# Altium PCB PCB_power_long_clock_2022-06-03.pcbdoc
Units mil, origin at the board's own origin, x right, y up, seen from the top; angles counter-clockwise.
Board outline 2702.91 x 2805.46 mil, 2 copper layers (Top Layer, Bottom Layer); 19 components, 26 nets, 87 pads, 14 vias.
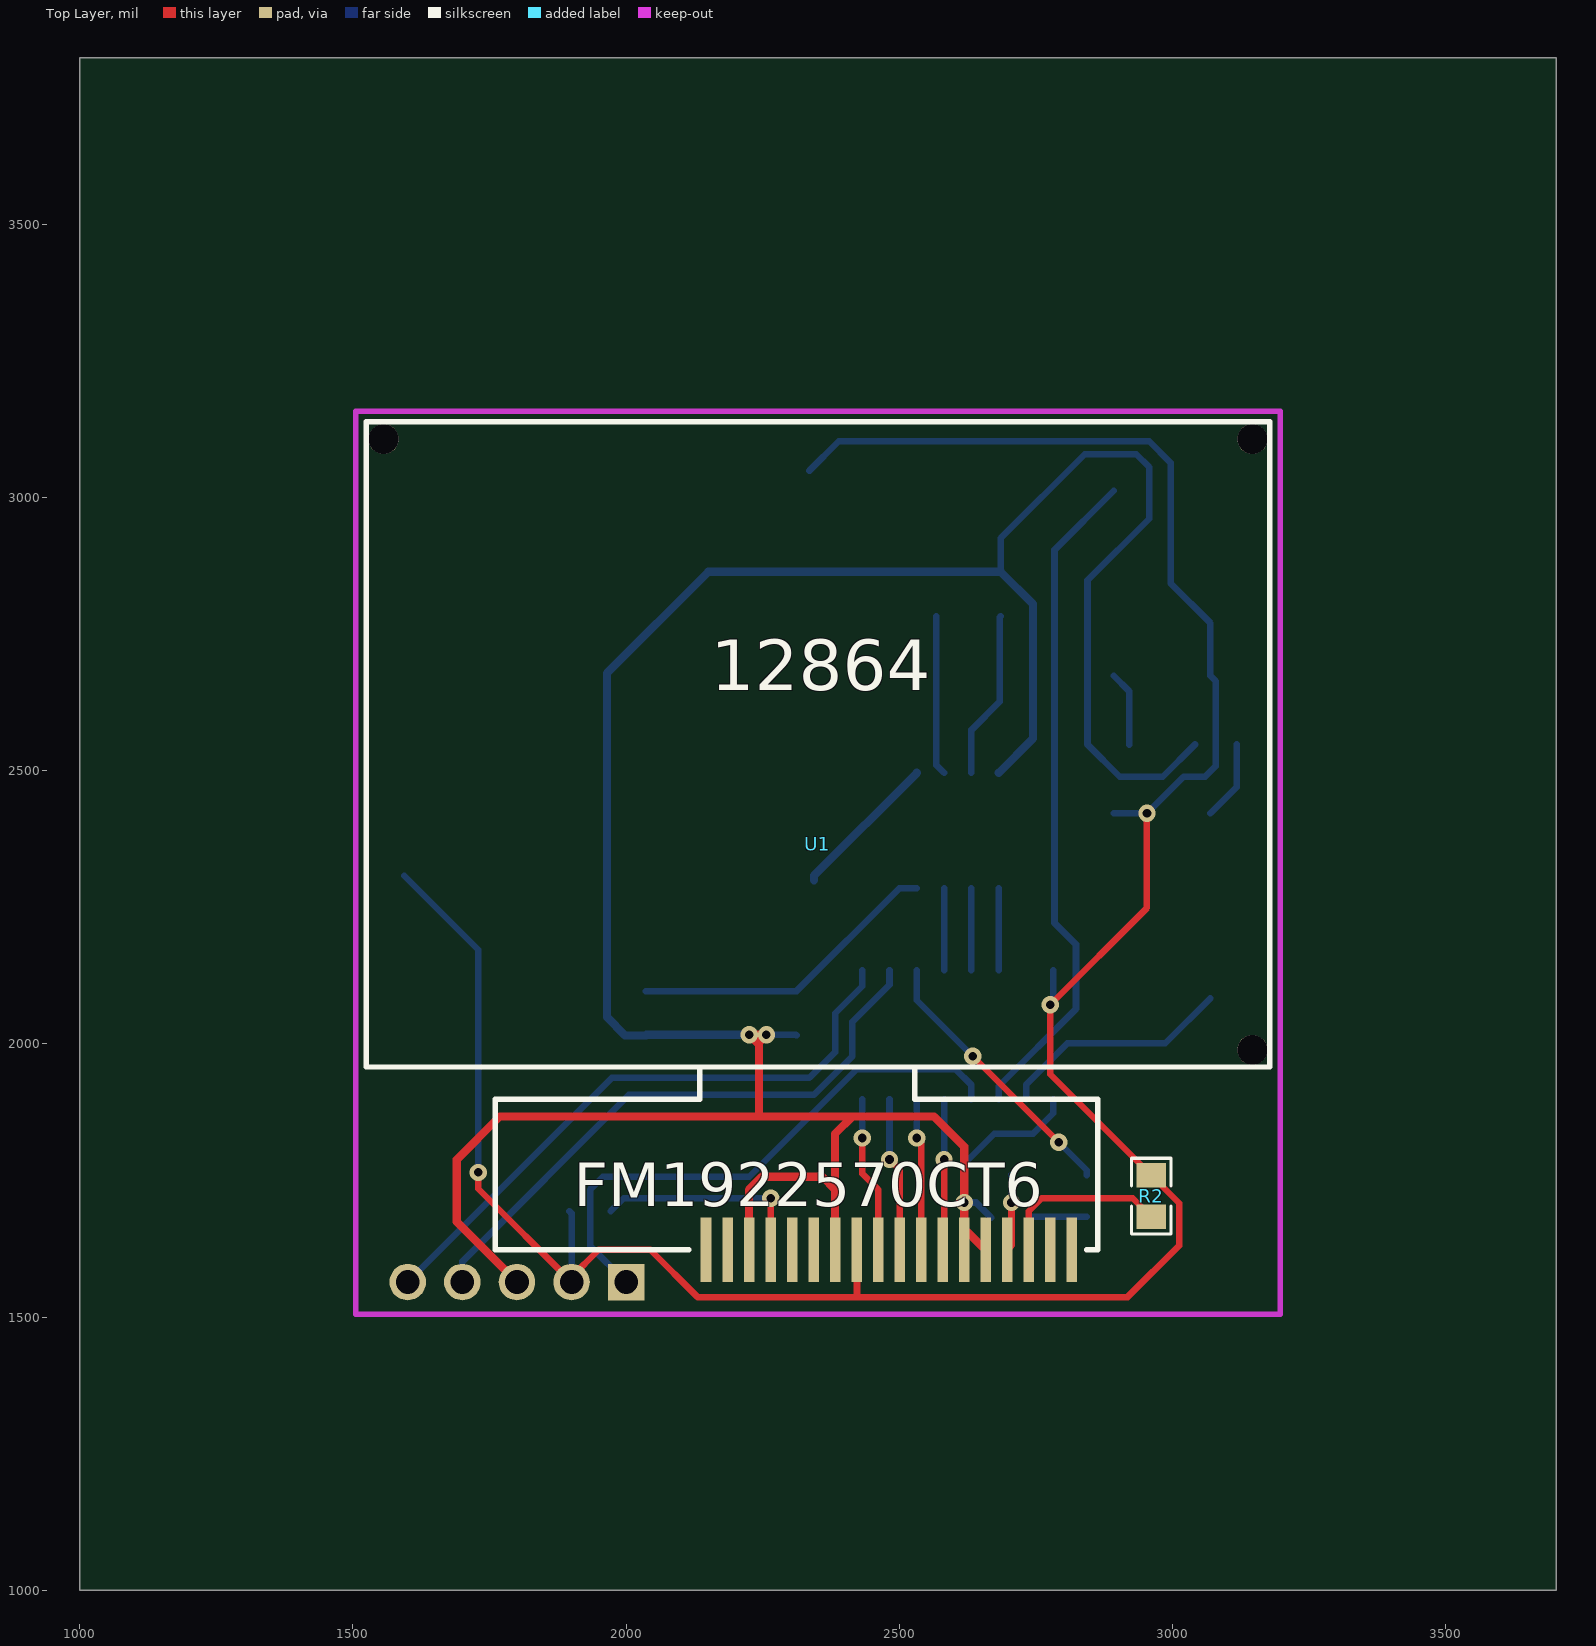
[diagram p0: Top Layer view]
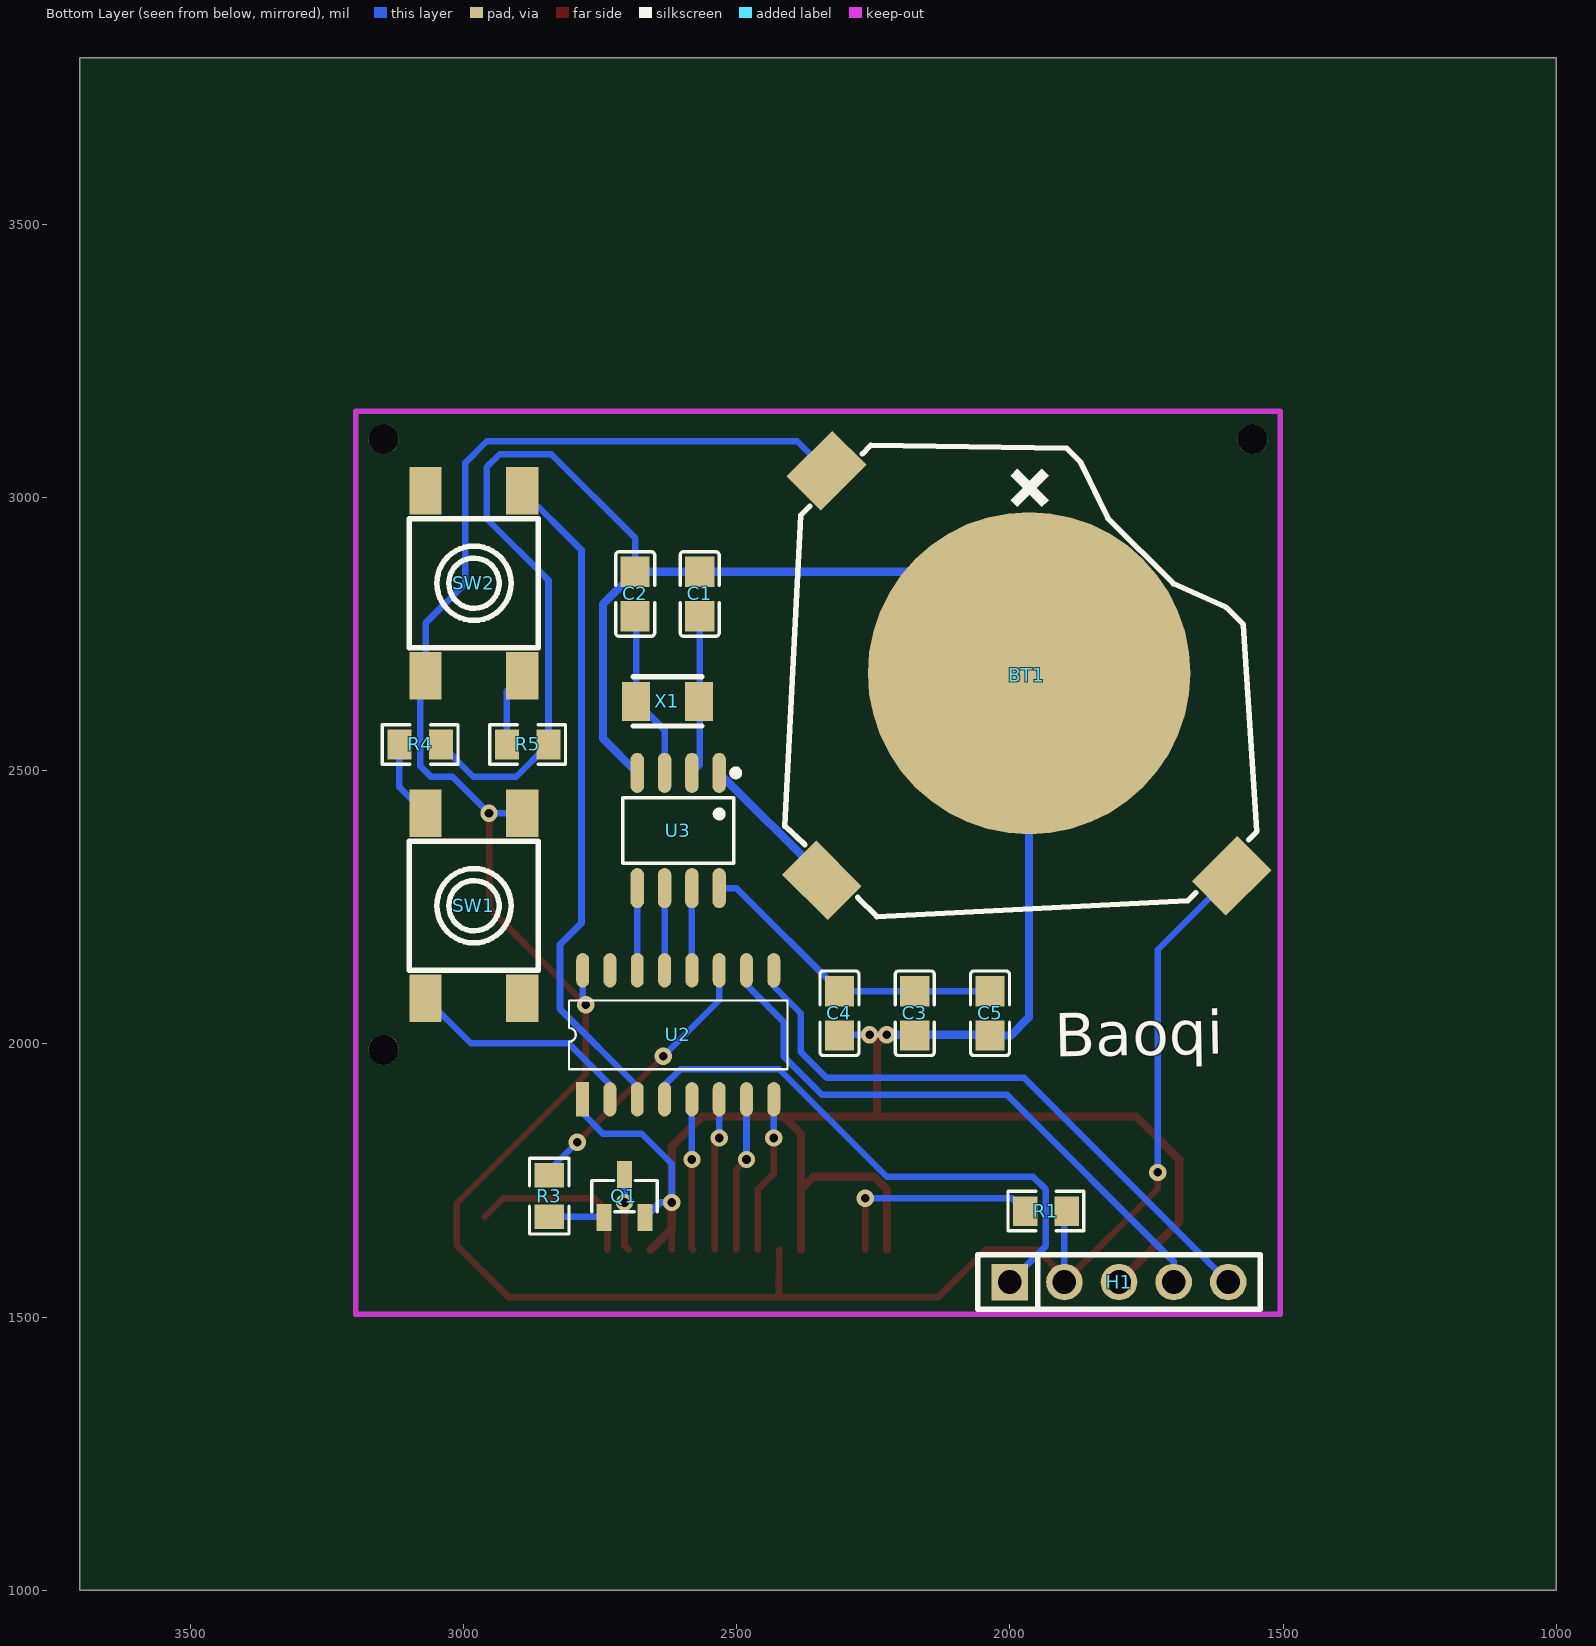
[diagram p1: Bottom Layer view, seen from below]

## Layer stack, top to bottom
Top Layer: signal copper (thickness not stored)
Dielectric: dielectric 12.6, FR-4, Dk 4.8
Bottom Layer: signal copper (thickness not stored)

## Board outline
3702.91,1000 1000,1000 1000,3805.46 3702.91,3805.46

## Components (designator, comment, footprint, x,y, rotation, side; value= is the part's Value field where it differs from the comment)
BT1 "MY-2430-02" BAT-SMD_MY-2430-02 2154.61,2489.25 r45 bottom
C1 "6pF" C0805 2567.99,2823.9 r90 bottom
C2 "6pF" C0805 2686.1,2823.9 r90 bottom
C3 "10uF" C0805 2174.29,2056.18 r90 bottom
C4 "10uF" C0805 2312.09,2056.18 r90 bottom
C5 "10uF" C0805 2036.5,2056.18 r90 bottom
H1 "PZ254V-11-05P" HDR-TH_5P-P2.54-V-M 1800.28,1564.06 r0 bottom
Q1 "S8050_C908252" SOT-23-3_L2.9-W1.3-P1.90-LS2.4-BR 2705.79,1721.54 r90 bottom
R1 "1K" R0805#1 1934.13,1693.98 r0 bottom
R2 "1K" R0805#2 2961.69,1721.54 r90 top
R3 "1K" R0805#1 2843.58,1721.54 r270 bottom
R4 "1K" R0805#1 3079.8,2548.31 r0 bottom
R5 "1K" R0805#1 2882.95,2548.31 r0 bottom
SW1 "YTSD003A0502504B" KEY-SMD_4P-L6.0-W6.0-P4.50-LS8.6 2981.38,2253.03 r90 bottom
SW2 "YTSD003A0502504B" KEY-SMD_4P-L6.0-W6.0-P4.50-LS8.6 2981.38,2843.58 r270 bottom
U1 "FM1922570CT6-12864" FPC-SMD_18P-P1.00_12864 2351.46,1623.11 r0 top
U2 "F05S16" SOP16 2607.36,2016.81 r270 bottom
U3 "DS1302M/TR_C910881" SOP-8_L4.9-W3.9-P1.27-LS6.0-BL 2607.36,2390.83 r180 bottom
X1 "32.768kHz" CRYSTAL-SMD_L3.2-W1.5 2627.05,2627.05 r0 bottom

## Footprints (in the part's own frame and the unit in brackets; to place one, negate y for a bottom-side part, rotate by r counter-clockwise, add the part's x,y. Pads: shape width x height; smd on the part's side, far side on the other; paste and mask are expansions set on the pad)
BAT-SMD_MY-2430-02 [mm]
  rect 2.25x3 smd: 1(-13.325,-6.813) 1(13.325,-6.813)
  rect 3x2.25 smd: 1(0,6.812)
  round 15 smd: 2(0,-6.813)
  silkscreen extent -12.7,-15.45 12.7,6.25
C0805 [mm]
  rect 1.41x1.35 smd: 1(1.03,0) 2(-1.03,0)
  silkscreen extent -1.96,-0.9 1.96,0.9
CRYSTAL-SMD_L3.2-W1.5 [mm]
  rect 1.3x1.8 smd: 1(1.458,0) 2(-1.458,0)
  silkscreen extent -1.6,-1.14 1.6,1.14
FPC-SMD_18P-P1.00_12864 [mm]
  rect 0.5x3 smd: 1(11.797,0) 2(10.797,0) 3(9.797,0) 4(8.797,0) 5(7.797,0) 6(6.797,0) 7(5.797,0) 8(4.797,0) 9(3.797,0) 10(2.797,0) 11(1.797,0) 12(0.797,0) 13(-0.203,0) 14(-1.203,0) 15(-2.203,0) 16(-3.203,0) 17(-4.203,0) 18(-5.203,0)
  round 1.4 hole 1.4 unplated: ""(-20.2,37.7) ""(20.2,9.3) ""(20.2,37.7)
  silkscreen extent -21,0 21,38.5
HDR-TH_5P-P2.54-V-M [mm]
  rect 1.7x1.7 hole 1.1: 1(5.08,0)
  round 1.7 hole 1.1: 2(2.54,0) 3(0,0) 4(-2.54,0) 5(-5.08,0)
  silkscreen extent -6.56,-1.27 6.56,1.27
KEY-SMD_4P-L6.0-W6.0-P4.50-LS8.6 [mm]
  rect 2.2x1.5 smd: 1(4.3,-2.25) 2(-4.3,-2.25) 3(4.3,2.25) 4(-4.3,2.25)
  silkscreen extent -3,-3 3,3
R0805#1 [mil]
  rect 44.59x54.21 smd: 1(38.04,0) 2(-38.04,0)
  silkscreen extent -69,-36 69,36
R0805#2 [mil]
  rect 44.59x54.21 smd: 1(-38.04,0) 2(38.04,0)
  silkscreen extent -69,-36 69,36
SOP16 [mm]
  rect 1.6x0.6 smd: 1(3,-4.445)
  oval 1.6x0.6 smd: 2(3,-3.175) 3(3,-1.905) 4(3,-0.635) 5(3,0.635) 6(3,1.905) 7(3,3.175) 8(3,4.445) 9(-3,4.445) 10(-3,3.175) 11(-3,1.905) 12(-3,0.635) 13(-3,-0.635) 14(-3,-1.905) 15(-3,-3.175) 16(-3,-4.445)
  silkscreen extent -1.6,-5.08 1.6,5.08
SOP-8_L4.9-W3.9-P1.27-LS6.0-BL [mm]
  oval 0.63x1.865 smd: 1(1.905,2.682) 2(0.635,2.682) 3(-0.635,2.682) 4(-1.905,2.682) 5(-1.905,-2.682) 6(-0.635,-2.682) 7(0.635,-2.682) 8(1.905,-2.682)
  silkscreen extent -2.58,-1.52 2.82,2.83
SOT-23-3_L2.9-W1.3-P1.90-LS2.4-BR [mm]
  rect 1.25x0.7 smd: 1(-1,0.95) 2(-1,-0.95) 3(1,0)
  silkscreen extent -0.73,-1.53 0.73,1.53

## Via types
v1: diameter 31.5, hole 15.75, Top Layer to Bottom Layer, 14 vias

## Nets (pads, with @x,y where several pads share a name; then routed paths per layer and width w, separated by ;. In a path a pad name is that pad's centre, name@x,y a point inside that pad or via, vN(x,y) a via of type N, cw(c..) or ccw(c..) an arc to the next point about the centre after c; other vN are vias at no path point)
1302_CE: U2.14 U3.5 | length 150.3
  Bottom Layer w12: U2.14 U3.5
1302_CLK: U2.12 U3.7 | length 150.3
  Bottom Layer w12: U2.12 U3.7
1302_DAT: U2.13 U3.6 | length 150.3
  Bottom Layer w12: U2.13 U3.6
12864_CLC: U1.9 U2.7 | length 283.3
  Top Layer w12: v1(2482.36,1788.46) 2500.95,1769.88 U1.9
  Bottom Layer w12: v1(2482.36,1788.46) U2.7
12864_DAT: U1.10 U2.8 | length 287.7
  Top Layer w12: v1(2432.36,1827.83) 2432.39,1762.7 2461.68,1733.3 U1.10
  Bottom Layer w12: v1(2432.36,1827.83) U2.8
12864_DC: U1.8 U2.6 | length 278.9
  Top Layer w12: v1(2532.36,1827.83) 2540.32,1819.88 U1.8
  Bottom Layer w12: v1(2532.36,1827.83) U2.6
12864_LED: R3.2 U2.11 | length 504.3
  Top Layer w12: v1(2634.93,1977.44) v1(2792.41,1819.96)
  Bottom Layer w12: U2.11 2532.36,2080 v1(2634.93,1977.44) ; v1(2792.41,1819.96) 2843.59,1768.8 R3.2
12864_RST: U1.7 U2.5 | length 276.7
  Top Layer w12: U1.7 2582.36,1625.79 v1(2582.36,1788.46)
  Bottom Layer w12: v1(2582.36,1788.46) U2.5
BATTERY: C3.1 C4.1 C5.1 U3.8 | length 573.9
  Bottom Layer w12: C5.1 C4.1 2500.57,2285.22 U3.8
BTN_1: SW1.4 U2.2 | length 429.8
  Bottom Layer w12: U2.2 2732.39,1925.3 2808.18,2001.1 2987.28,2001.1 SW1.4
BTN_2: SW2.4 U2.3 | length 1234
  Bottom Layer w12: U2.3 2682.39,1922.5 2823.89,2064.1 2823.89,2182.2 2784.49,2221.5 2784.49,2904.6 SW2.4
GND: BT1.2 C1.1 C2.1 C3.2 C4.2 C5.2 H1.3 Q1.2 R4.2 R5.2 U1.5 U1.6 U1.12 U1.16 U2.1 U3.4 | length 6187.5
  Top Layer w12: U1.6 v1(2619.18,1709.72)
  Top Layer w15: H1.3 1690.09,1674.3 1690.09,1788.5 1768.79,1867.2 2414.49,1867.2 ; U1.16 2225.39,1733.2 2249.09,1757 2359.28,1757 2382.78,1733.5 U1.12 2382.78,1835.6 2414.49,1867.2 ; v1(2225.47,2016.81) v1(2256.97,2016.81) 2243.16,2003.01 2243.16,1999.12 ; v1(2225.47,2016.81) 2243.16,1999.12 ; 2243.16,1867.2 2243.16,1999.12 ; v1(2619.18,1709.72) 2619.17,1662.36 U1.5 ; v1(2619.18,1709.72) 2619.18,1812.1 2564.09,1867.2 2414.49,1867.2
  Bottom Layer w12: v1(2225.47,2016.81) v1(2256.97,2016.81) 2310.91,2016.81 C4.2 ; Q1.2 2640.83,1709.72 v1(2619.18,1709.72) 2619.17,1780.59 2674.29,1835.71 2745.16,1835.71 2782.36,1872.91 U2.1 ; C2.1 2686.09,2926.3 2839.68,3079.8 2934.18,3079.8 2957.78,3056.2 2957.78,2961.7 2844.89,2848.9 R5.2 2903.97,2489.25 2982.71,2489.25 R4.2
  Bottom Layer w15: BT1.2@1964.95,2678.9 2150.49,2864.45 C1.1 C2.1 ; BT1.2 1964.98,2049 1998.29,2015.6 C5.2 ; C5.2 2037.68,2016.81 v1(2225.47,2016.81) ; U3.4 2745.18,2559.2 2745.18,2805.4 C2.1
N$5015: 
N$5017: 
R3_1: Q1.1 R3.1 | length 100.9
  Bottom Layer w12: Q1.1 2744.52,1683.49 R3.1
R4_1: R4.1 SW1.3 | length 145.8
  Bottom Layer w12: SW1.3 3117.84,2470.2 R4.1
R5_1: R5.1 SW2.3 | length 137.7
  Bottom Layer w12: SW2.3 2920.99,2646.09 R5.1
RST: H1.1 U2.4 | length 1024.4
  Bottom Layer w12: H1.1 1934.09,1630.2 1934.09,1733.3 1957.79,1757 2225.49,1757 2422.28,1953.8 2603.39,1953.8 2632.39,1924.9 U2.4
SCK: H1.5 U2.9 | length 1127.2
  Bottom Layer w12: H1.5 1974.29,1938.1 2335.68,1938.1 2382.99,1985.3 2382.99,2056.2 2432.39,2105.6 U2.9
SDA: H1.4 U2.10 | length 1093.2
  Bottom Layer w12: H1.4 1700.29,1601.9 2004.98,1906.6 2343.59,1906.6 2414.49,1977.4 2414.49,2040.5 2482.39,2108.3 U2.10
U1_3: R2.1 U1.3 | length 319.2
  Top Layer w12: U1.3 2737.16,1693.86 2760.91,1717.6 2927.59,1717.6 R2.1
U1_4: Q1.3 U1.4 | length 141.1
  Top Layer w12: U1.4 2705.79,1631.1 v1(2705.78,1709.72)
  Bottom Layer w12: v1(2705.78,1709.72) Q1.3
U1_15: R1.1 U1.15 | length 397
  Top Layer w12: U1.15 v1@2264.89,1717.6
  Bottom Layer w12: R1.1 1995.8,1717.6 v1(2264.84,1717.6)
VCC: BT1.1 H1.2 R1.2 R2.2 SW1.1 SW2.1 U1.11 U2.16 U3.1 | length 5121.1
  Top Layer w12: v1(1729.41,1764.84) 1729.41,1734.92 H1.2 ; H1.2 1900.29,1573.5 1949.88,1623.1 2044.38,1623.1 2130.99,1536.5 2918.39,1536.5 3012.89,1631 3012.89,1708.4 R2.2 2776.66,1944.61 v1(2776.66,2071.93) 2953.78,2249.06 v1(2953.78,2422.3) ; U1.11 2422.89,1536.5
  Bottom Layer w12: BT1.1@1594,2307.95 1729.41,2172.54 v1(1729.41,1764.84) ; R1.2 1900.28,1689.79 H1.2 ; BT1.1@2335.89,3049.9 2389.49,3103.4 2957.78,3103.4 2997.09,3064.1 2997.09,2843.6 3069.99,2770.7 SW2.1 3079.78,2664.5 3079.78,2508.9 3060.09,2489.3 3020.78,2489.3 v1(2953.78,2422.3) SW1.1 ; v1(2776.66,2071.93) 2782.39,2077.66 U2.16
  Bottom Layer w15: BT1.1@2344.26,2299.59 2344.26,2308.33 U3.1
X1_1: C2.2 U3.3 X1.1 | length 309.2
  Bottom Layer w12: U3.3 2632.36,2574.96 X1.1 2684.45,2781.69 C2.2
X1_2: C1.2 U3.2 X1.2 | length 292.9
  Bottom Layer w12: C1.2 2567.99,2510.81 U3.2
pads on no net: SW1.2 SW2.2 U1. U1.1 U1.2 U1.13 U1.14 U1.17 U1.18 U2.15

## Silkscreen, mask and mechanical layers (free items; w line width, h text height)
Bottom Overlay:
  text "Baoqi" at 1917.69,1976.82 h80 r359

## Text inside footprints (layer, text, board x,y; h text height)
U1: Top Overlay "FM1922570CT6" at 1904.68,1702.76 h80; Top Overlay "12864" at 2154.68,2617.76 h157.48